# EAGLE board ATtinyBoard (EAGLE 6.4)

Size 100 x 80 mm. Coordinates in mm from the lower left corner, seen from the top.
Outline: 0,0 100,0 100,80 0,80 0,0
Copper layers (1*16): Top 0.035mm / dielectric 1.5mm / Bottom 0.035mm
Design rules "default": minimum track width 10mil, minimum drill 24mil, track to track 8mil, track to pad 8mil, pad to pad 8mil, via to via 8mil, smd to smd 8mil, copper to edge 40mil, drill to drill 8mil, minimum pad ring 10mil, minimum via ring 8mil, stop-mask expansion 4mil, vias tented up to drill 0mil, thermal gap 10mil

## Footprints (pad centres in the part's own frame; a part is rotated, then mirrored left to right if it is on the bottom)
8S1 = smd 0.6 x 1.6: 1 -1.905,-2.654; 2 -0.645,-2.654; 3 0.625,-2.654; 4 1.895,-2.654; 5 1.905,2.654; 6 0.635,2.654; 7 -0.635,2.654; 8 -1.905,2.654
1X06-SMD = smd 1 x 3: 1 -6.35,5; 2 -3.81,5; 3 -1.27,5; 4 1.27,5; 5 3.81,5; 6 6.35,5 | hole 1.4: -5.08,0; 5.08,0
JST-2-SMD = smd 1 x 4.6: 1 -1,-3.7; 2 1,-3.7 | smd 1.6 x 3.4: NC1 -3.4,1.5; NC2 3.4,1.5
AYZ0202 = smd 1 x 1.15: 1 -2.5,2.825; 2 0,2.825; 3 2.5,2.825; 4 -2.5,-2.825; 5 0,-2.825; 6 2.5,-2.825 | hole 0.85: 1.5,0; -1.5,0

## Placement (x,y rotation side)
IC1  TINY13-20SSU  [8S1]  30.48,15.24 270 top
ISP/FTDI-CONNECTOR  [1X06-SMD]  55.88,16.51 90 top
JP1  M02-JST-2MM-SMT  [JST-2-SMD]  41.91,24.13 0 top
S1  DPDT  [AYZ0202]  41.91,7.62 0 top

## Library data of the parts
IC1 = atmel; MPN: ATTINY13-20SSU; OC_FARNELL: 1455133; OC_NEWARK: 58M3771
ISP/FTDI-CONNECTOR = SparkFun-Connectors
JP1 = SparkFun-Connectors; PROD_ID: CONN-08352
S1 = SparkFun-Electromechanical; PROD_ID: SWCH-08179

## Nets
N$1: IC1.8 ISP/FTDI-CONNECTOR.4
N$2: IC1.4 ISP/FTDI-CONNECTOR.6
N$3: IC1.1 ISP/FTDI-CONNECTOR.5
N$4: IC1.6 ISP/FTDI-CONNECTOR.3
N$5: ISP/FTDI-CONNECTOR.1 S1.2
N$6: IC1.5 ISP/FTDI-CONNECTOR.2
N$7: IC1.3
N$8: IC1.7 S1.1

## Tracks (layer width: path | path; a pad name or v marks a point on that pad's centre or on a via)
N$1  (1 unrouted)
N$2  (1 unrouted)
N$3  (1 unrouted)
N$4  (1 unrouted)
N$5  (1 unrouted)
N$6  (1 unrouted)
N$8  (1 unrouted)